# Altium PCB monitoring_board.PcbDoc
Units mm, origin at the board's own origin, x right, y up, seen from the top; angles counter-clockwise.
Board outline 82.91 x 56.91 mm, 2 copper layers (Top Layer, Bottom Layer); 71 components, 70 nets, 236 pads, 33 vias.
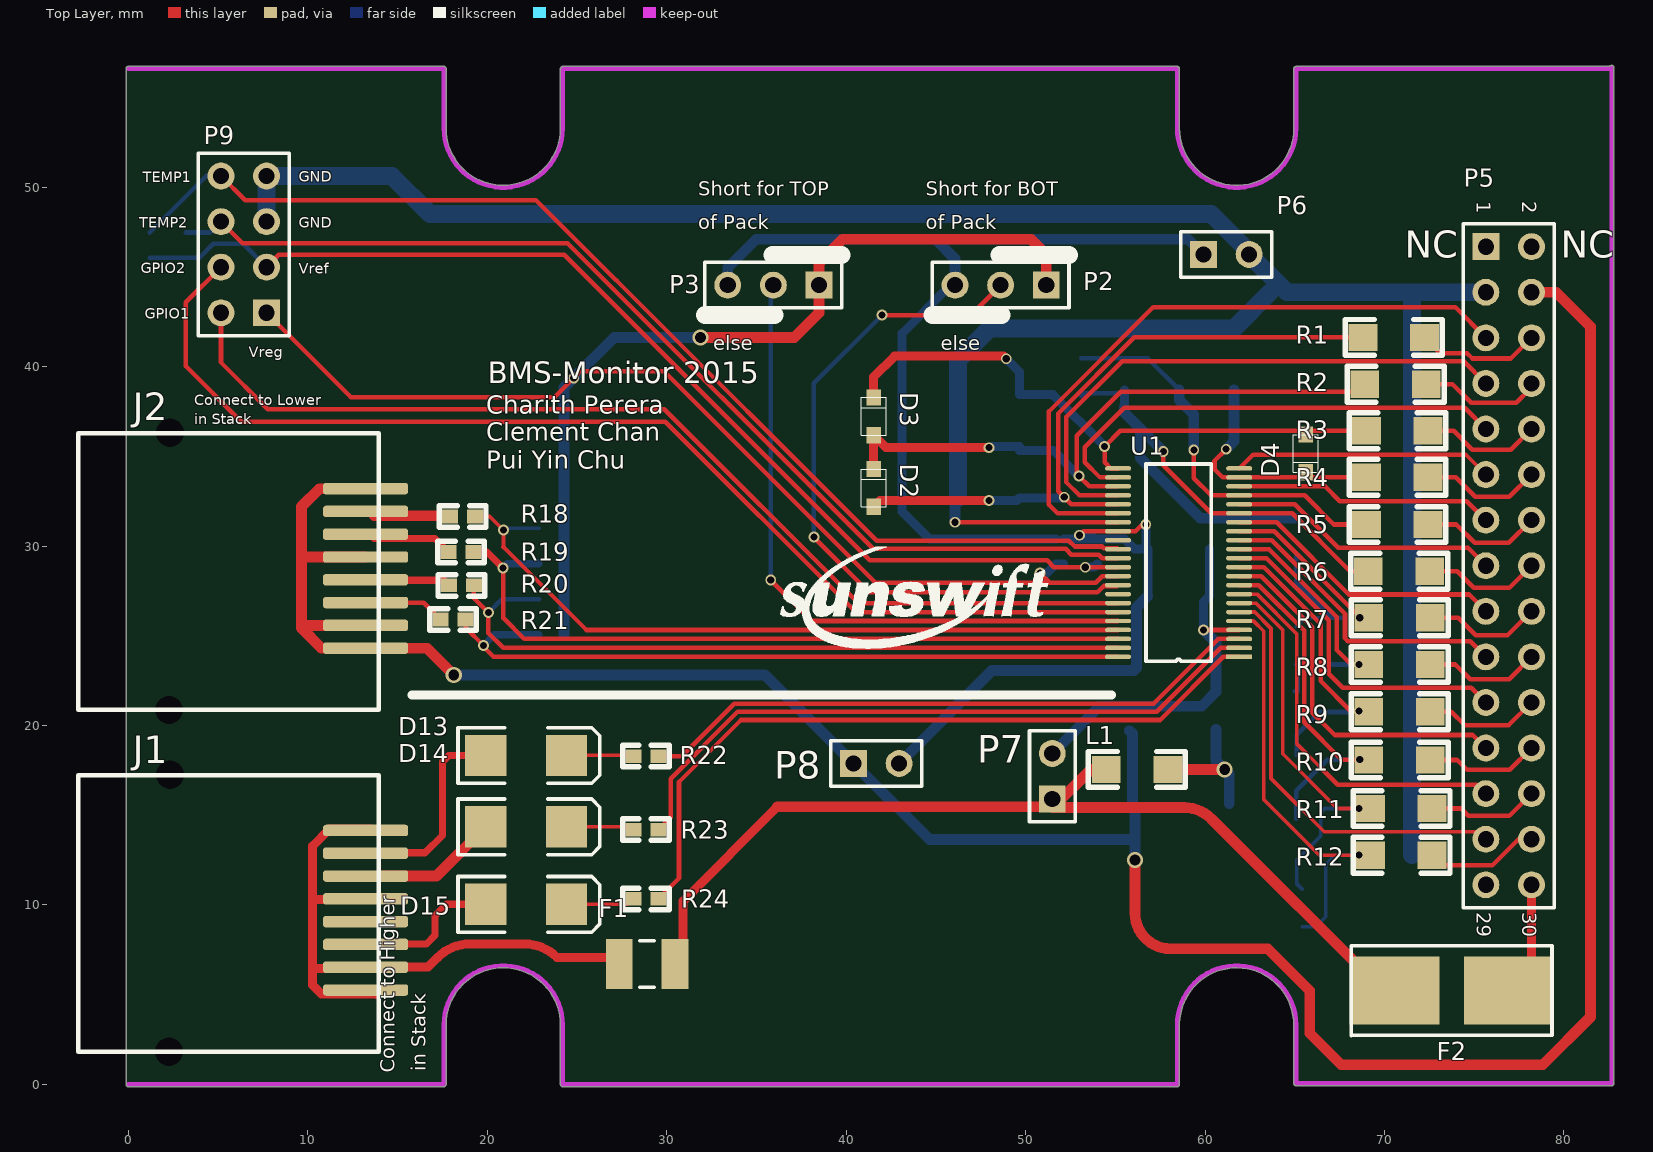
[diagram p0: Top Layer view]
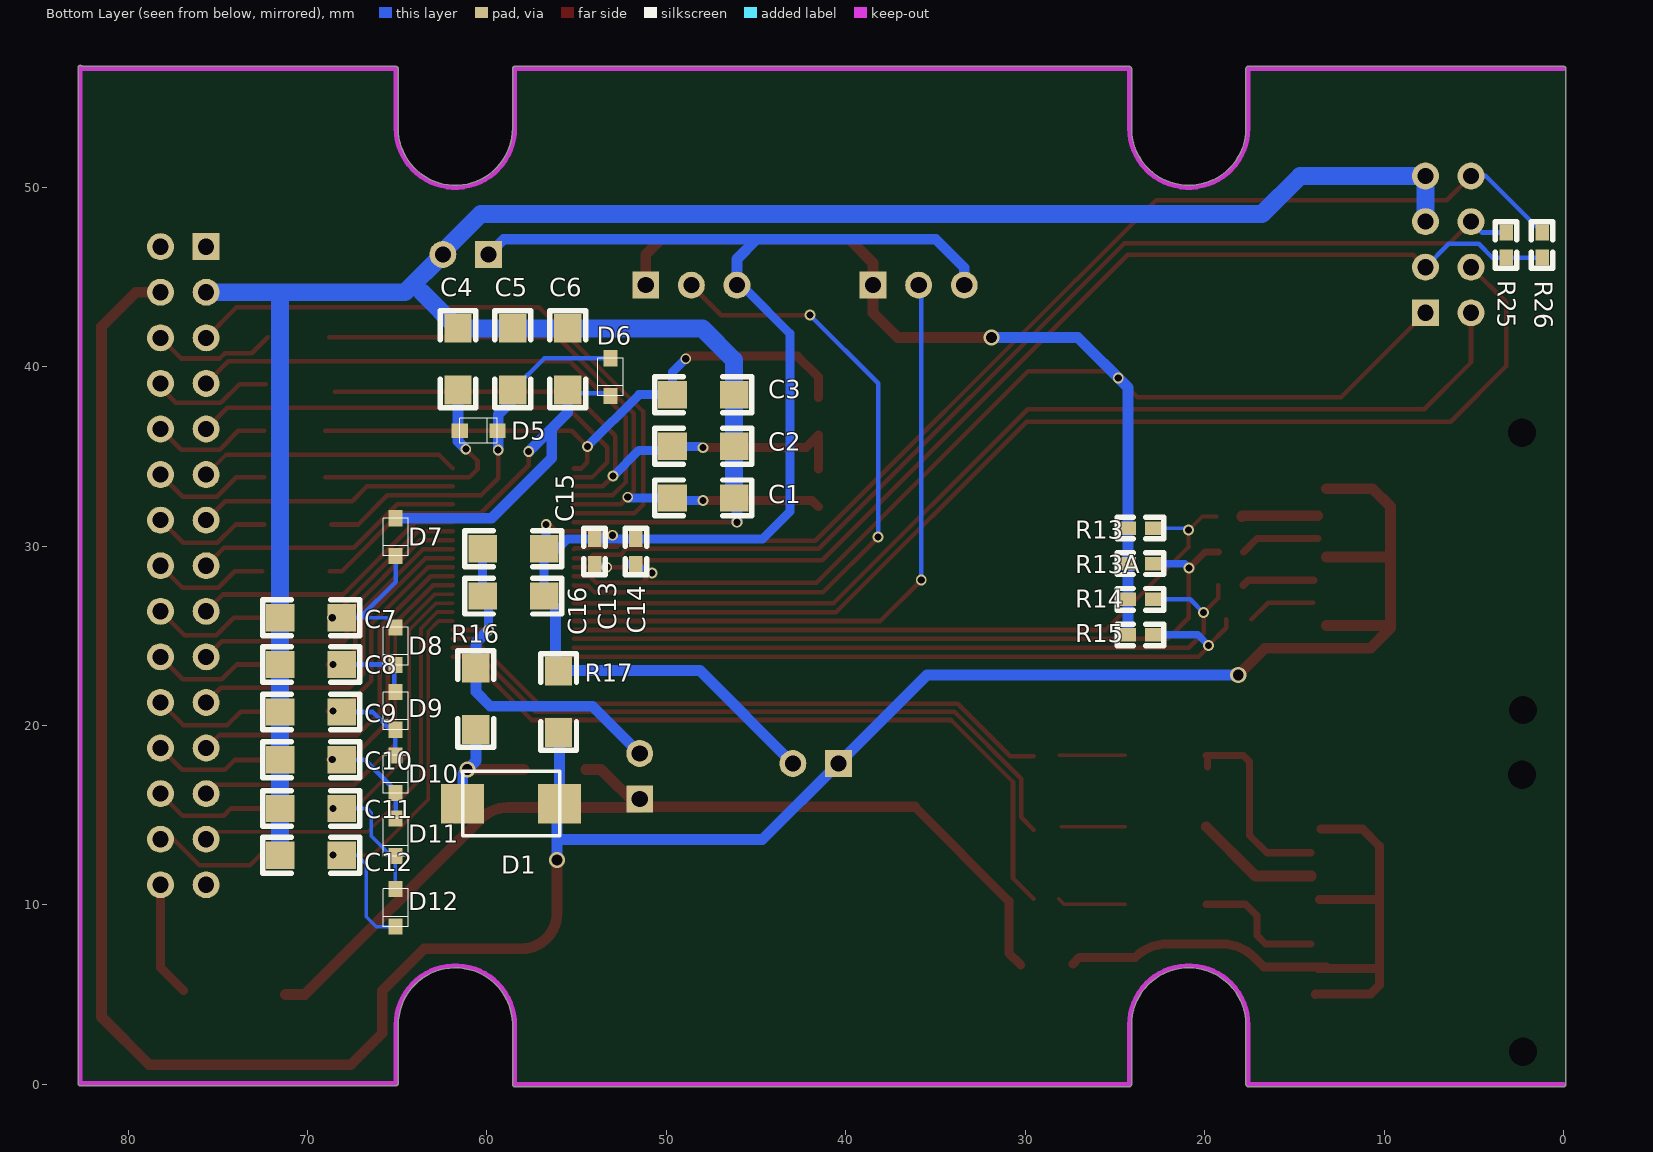
[diagram p1: Bottom Layer view, seen from below]

## Layer stack, top to bottom
Top Solder: solder mask 0.0102, Solder Resist, Dk 3.5
Top Layer: signal copper 0.0356
Dielectric1: dielectric 0.32, FR-4, Dk 4.8
Bottom Layer: signal copper 0.0356
Bottom Solder: solder mask 0.0102, Solder Resist, Dk 3.5

## Board outline
-0.127,0 ccw(c0,0) 0,-0.127 17.575,-0.127 ccw(c17.575,0) 17.702,0 17.702,3.31 ccw(c17.575,3.31) 17.702,3.312 cw(c20.89,3.31) 24.078,3.312 ccw(c24.205,3.31) 24.078,3.31 24.078,0 ccw(c24.205,0) 24.205,-0.127 58.445,-0.127 ccw(c58.445,0) 58.572,0 ccw(c58.445,0) 58.571,0.017 ccw(c58.448,0.05) 58.576,0.05 58.576,3.36 ccw(c58.448,3.36) 58.573,3.384 cw(c61.76,3.31) 64.948,3.31 ccw(c65.075,3.31) 64.951,3.282 64.951,0.05 ccw(c65.078,0.05) 65.078,-0.077 82.653,-0.077 ccw(c82.653,0.05) 82.781,0.05 82.781,56.655 ccw(c82.653,56.655) 82.548,56.727 65.075,56.727 ccw(c65.075,56.6) 64.948,56.6 64.948,53.29 cw(c65.075,53.29) 64.948,53.291 64.948,53.29 cw(c61.76,53.29) 58.572,53.29 ccw(c58.445,53.29) 58.572,53.291 58.572,56.6 ccw(c58.445,56.6) 58.445,56.727 24.205,56.727 ccw(c24.205,56.6) 24.078,56.6 24.078,53.29 ccw(c24.205,53.29) 24.078,53.288 ccw(c20.89,53.29) 24.078,53.29 24.078,53.288 cw(c20.89,53.29) 17.702,53.29 ccw(c17.575,53.29) 17.702,53.292 ccw(c17.575,53.295) 17.702,53.295 17.702,56.605 ccw(c17.575,56.605) 17.54,56.727 0,56.727 ccw(c0,56.6) -0.127,56.6

## Design rules (kind name [scope] priority, off if disabled: settings)
Clearance [All] p1: gap=0.2
Clearance Clearance_1 [InNet('C_0')] p2: gap=1
FabricationTestpoint [(IsPad And (OnTopLayer Or OnBottomLayer))] p1: side=3 testpointundercomponent=TRUE minsize=1.016 maxsize=2.54 preferedsize=1.524 minholesize=0 maxholesize=1.016 preferedholesize=0.813 testpointgrid=0.025 allowsidetop=TRUE allowsidebottom=TRUE usegrid=TRUE gridtolerance=0
HoleSize [All] p1: absolutevalues=TRUE maxlimit=4 minlimit=0.4 maxpercent=80.000 minpercent=20.000
MinimumSolderMaskSliver [All] p1 off: minsoldermaskwidth=0.254
PolygonConnect [All] p1: connectstyle=Relief reliefconductorwidth=0.254 reliefentries=4 polygonreliefangle="90 Angle" airgapwidth=0.254
RoutingVias [All] p1: holewidth=0.4 width=0.8 viastyle="Through Hole" minholewidth=0.2 minwidth=0.4 maxholewidth=0.6 maxwidth=1
SMDNeckDown [All] p1 off: percent=50.000
SilkToSilkClearance [All] p1 off: silktosilkclearance=0.05
SilkToSolderMaskClearance SilkscreenOverComponentPads [IsPad] p1 off: minsilkscreentomaskgap=0.05 clearancetoexposedcopper=TRUE
SolderMaskExpansion [All] p1: expansion=0.102
Width [All] p1: maxlimit=1 minlimit=0.2 preferedwidth=0.254
25 further rules are at their usual default settings.

## Components (designator, comment, footprint, x,y, rotation, side; value= is the part's Value field where it differs from the comment)
C1 "3.3uF 100V" 1206 49.654,32.68 r180 bottom
C2 "3.3uF 100V" 1206 49.654,35.559 r180 bottom
C3 "3.3uF 100V" 1206 49.654,38.437 r180 bottom
C4 "3.3uF 100V" 1206 61.614,38.7 r90 bottom
C5 "3.3uF 100V" 1206 58.558,38.7 r90 bottom
C6 "3.3uF 100V" 1206 55.502,38.7 r90 bottom
C7 "3.3uF 100V" 1206 68.092,26 r0 bottom
C8 "3.3uF 100V" 1206 68.092,23.4 r0 bottom
C9 "3.3uF 100V" 1206 68.092,20.75 r0 bottom
C10 "3.3uF 100V" 1206 68.092,18.1 r0 bottom
C11 "3.3uF 100V" 1206 68.092,15.375 r0 bottom
C12 "3.3uF 100V" 1206 68.092,12.775 r0 bottom
C13 "1uF 10V" 0603 54,29 r90 bottom
C14 "1uF 10V" 0603 51.7,29 r90 bottom
C15 "100nF 100V" 1206 60.241,29.843 r180 bottom
C16 "3.3uF 100V" 1206 60.241,27.212 r180 bottom
D1 "62V Zener" DO-214AA 55.95,15.65 r0 bottom
D2 "PDZ7.5B" SOD323 41.529,34.29 r270 top
D3 "PDZ7.5B" SOD323 41.529,38.278 r270 top
D4 "PDZ7.5B" SOD323 65.608,34.112 r90 top
D5 "PDZ7.5B" SOD323 59.419,36.425 r0 bottom
D6 "PDZ7.5B" SOD323 53.111,38.362 r90 bottom
D7 "PDZ7.5B" SOD323 65.092,29.447 r90 bottom
D8 "PDZ7.5B" SOD323 65.092,23.368 r90 bottom
D9 "PDZ7.5B" SOD323 65.092,19.761 r90 bottom
D10 "PDZ7.5B" SOD323 65.092,16.231 r90 bottom
D11 "PDZ7.5B" SOD323 65.092,12.725 r90 bottom
D12 "PDZ7.5B" SOD323 65.092,8.788 r90 bottom
D13 "D Schottky" SMB 22.169,18.331 r0 top
D14 "D Schottky" SMB 22.169,14.351 r0 top
D15 "D Schottky" SMB 22.169,10.033 r0 top
F1 "SATA_FUSE" RESC3225M_1210I 28.905,6.706 r180 top
F2 "SATA_FUSE" LITTELFUSE-154 73.736,5.232 r0 top
J1 "8P8C-1PORT" 8P8C-1PORT 2.261,17.069 r270 top
J2 "8P8C-1PORT" 8P8C-1PORT 2.261,36.119 r270 top
L1 "BLM31PG330SN1L" 1206 54.5,17.55 r0 top
P2 "Header 3" HDR1X3 51.15,44.54 r180 top
P3 "Header 3" HDR1X3 38.48,44.54 r180 top
P5 "Header 15X2" HDR2X15 75.65,46.682 r270 top
P6 "Header 2" HDR1X2 59.915,46.25 r0 top
P7 "Header 2" HDR1X2 51.486,15.9 r90 top
P8 "Header 2" HDR1X2 40.411,17.882 r0 top
P9 "Header 4X2" HDR2X4 7.7,43 r90 top
R1 "4.7k" 1206 72.225,41.625 r180 top
R2 "4.7k" 1206 72.325,39.025 r180 top
R3 "4.7k" 1206 72.425,36.425 r180 top
R4 "4.7k" 1206 72.425,33.825 r180 top
R5 "4.7k" 1206 72.425,31.2 r180 top
R6 "4.7k" 1206 72.525,28.6 r180 top
R7 "4.7k" 1206 72.55,26 r180 top
R8 "4.7k" 1206 72.55,23.4 r180 top
R9 "4.7k" 1206 72.55,20.775 r180 top
R10 "4.7k" 1206 72.55,18.075 r180 top
R11 "4.7k" 1206 72.65,15.375 r180 top
R12 "4.7k" 1206 72.65,12.775 r180 top
R13 "1M" 0603 24.281,30.994 r180 bottom
R13A "1M" 0603 24.281,29.014 r180 bottom
R14 "1M" 0603 24.281,27.034 r180 bottom
R15 "1M" 0603 24.281,25.054 r180 bottom
R16 "100R" 1206 60.614,19.775 r90 bottom
R17 "100R" 1206 56.009,19.609 r90 bottom
R18 "100r" 0603 19.329,31.648 r180 top
R19 "100r" 0603 19.228,29.667 r180 top
R20 "100r" 0603 19.253,27.813 r180 top
R21 "100r" 0603 18.796,25.908 r180 top
R22 "100r" 0603 28.143,18.288 r0 top
R23 "100r" 0603 28.143,14.199 r0 top
R24 "100r" 0603 28.143,10.338 r0 top
R25 "200k" 0603 3.2,46.076 r90 bottom
R26 "200k" 0603 1.194,46.076 r90 bottom
U1 "LTC6803-3" SOP44 61.9,23.822 r180 top

## Footprints (in the part's own frame and the unit in brackets; to place one, negate y for a bottom-side part, rotate by r counter-clockwise, add the part's x,y. Pads: shape width x height; smd on the part's side, far side on the other; paste and mask are expansions set on the pad)
8P8C-1PORT [mm]
  rrect50% 0.64x4.75 smd: 1(2.92,10.96) 2(4.19,10.96) 3(5.46,10.96) 4(6.73,10.96) 5(8,10.96) 6(9.27,10.96) 7(10.54,10.96) 8(11.81,10.96)
  round 0 hole 1.57: ""(-0.19,0.06) ""(15.25,0)
  silkscreen extent -0.17,-5.06 15.25,11.7
0603 [mil]
  rect 35.43x30 smd: 1(0,0) 2(55,0)
  silkscreen extent -24,-24 79,24
1206 [mil]
  rect 62.99x60 smd: 1(0,0) 2(135,0)
  silkscreen extent -39,-39 173,39
DO-214AA [mm]
  rect 2.4x2.2 smd: 1(0,0) 2(5.4,0)
  silkscreen extent 0,-1.8 5.4,1.8
HDR1X2 [mm] "Connector; Header; 2 Position"
  rect 1.5x1.5 hole 0.9: 1(0,0)
  round 1.5 hole 0.9: 2(2.54,0)
  silkscreen extent -1.27,-1.27 3.81,1.27
HDR1X3 [mm] "Connector; Header; 3 Position"
  rect 1.5x1.5 hole 0.9: 1(0,0)
  round 1.5 hole 0.9: 2(2.54,0) 3(5.08,0)
  silkscreen extent -1.27,-1.27 6.35,1.27
HDR2X4 [mm] "Connector; Header; 4x2 Position"
  rect 1.5x1.5 hole 0.9: 1(0,0)
  round 1.5 hole 0.9: 2(0,2.54) 3(2.54,0) 4(2.54,2.54) 5(5.08,0) 6(5.08,2.54) 7(7.62,0) 8(7.62,2.54)
  silkscreen extent -1.27,-1.27 8.89,3.81
HDR2X15 [mm] "Connector; Header; 15x2 Position"
  rect 1.5x1.5 hole 0.9: 1(0,0)
  round 1.5 hole 0.9: 2(0,2.54) 3(2.54,0) 4(2.54,2.54) 5(5.08,0) 6(5.08,2.54) 7(7.62,0) 8(7.62,2.54) 9(10.16,0) 10(10.16,2.54) 11(12.7,0) 12(12.7,2.54) 13(15.24,0) 14(15.24,2.54) 15(17.78,0) 16(17.78,2.54) 17(20.32,0) 18(20.32,2.54) 19(22.86,0) 20(22.86,2.54) 21(25.4,0) 22(25.4,2.54) 23(27.94,0) 24(27.94,2.54) 25(30.48,0) 26(30.48,2.54) 27(33.02,0) 28(33.02,2.54) 29(35.56,0) 30(35.56,2.54)
  silkscreen extent -1.27,-1.27 36.83,3.81
LITTELFUSE-154 [mm]
  rect 5x3.81 smd: 1(-3.185,0) 2(3.185,0)
  silkscreen extent -5.6,-2.51 5.6,2.5
RESC3225M_1210I [mm] "Chip Resistor, Body 3.2x2.5mm, IPC Low Density"
  rect 1.5x2.8 smd: 1(-1.55,0) 2(1.55,0)
  silkscreen extent -0.4,-1.3 0.4,1.3, body extent -1.68,-1.32 1.68,1.32, height 0.71
SMB [mm] "DO-214-AA/SMB; 2 C-Bend Leads; Body 5.3 x 3.6 mm, inc. leads (LxW)"
  rect 2.3x2.3 smd: 1(-2.25,0) 2(2.25,0)
  silkscreen extent -3.8,-1.55 4.1,1.55
SOD323 [mm]
  rect 0.9x0.8 smd: A(2.1,0) K(0,0)
  silkscreen extent 0,-0.7 2.1,0.7
SOP44 [mm]
  rect 1.45x0.25 smd: 1(0,0)
  oval 1.45x0.25 smd: 2(0,-0.5) 3(0,-1) 4(0,-1.5) 5(0,-2) 6(0,-2.5) 7(0,-3) 8(0,-3.5) 9(0,-4) 10(0,-4.5) 11(0,-5) 12(0,-5.5) 13(0,-6) 14(0,-6.5) 15(0,-7) 16(0,-7.5) 17(0,-8) 18(0,-8.5) 19(0,-9) 20(0,-9.5) 21(0,-10) 22(0,-10.5) 23(6.75,-10.5) 24(6.75,-10) 25(6.75,-9.5) 26(6.75,-9) 27(6.75,-8.5) 28(6.75,-8) 29(6.75,-7.5) 30(6.75,-7) 31(6.75,-6.5) 32(6.75,-6) 33(6.75,-5.5) 34(6.75,-5) 35(6.75,-4.5) 36(6.75,-4) 37(6.75,-3.5) 38(6.75,-3) 39(6.75,-2.5) 40(6.75,-2) 41(6.75,-1.5) 42(6.75,-1) 43(6.75,-0.5) 44(6.75,0)
  silkscreen extent 1.56,-10.75 5.19,0.25

## Part data
C1 C2 C3 C4 C5 C6 C7 C8 C9 C10 C11 C12 C13 C14 C15 C16: library part CAP, "Capacitor"
D1: library part "D Schottky", "SMBJ64CABCT-ND"
D2 D3 D4 D5 D6 D7 D8 D9 D10 D11 D12: library part ZENER1, "Zener Diode"
D13 D14 D15: "Schottky Diode"
F1 F2: library part FUSE, "Fuse"
L1: library part INDUCTOR
P2 P3: "Header, 3-Pin"
P5: "Header, 15-Pin, Dual row"
P6 P7 P8: "Header, 2-Pin"
P9: "Header, 4-Pin, Dual row"
R1 R2 R3 R4 R5 R6 R7 R8 R9 R10 R11 R12 R13 R13A R14 R15 R16 R17 R18 R19 R20 R21 R22 R23 R24 R25 R26: library part RES1, "Resistor"

## Via types
v1: diameter 0.6, hole 0.4, Top Layer to Bottom Layer, 29 vias
v2: diameter 0.9, hole 0.6, Top Layer to Bottom Layer, 4 vias

## Nets (pads, with @x,y where several pads share a name; then routed paths per layer and width w, separated by ;. In a path a pad name is that pad's centre, name@x,y a point inside that pad or via, vN(x,y) a via of type N, cw(c..) or ccw(c..) an arc to the next point about the centre after c; other vN are vias at no path point)
C_0: C1.2 C2.2 C3.2 C4.2 C5.2 C6.2 C7.2 C8.2 C9.2 C10.2 C11.2 C12.2 P5.3 P6.2 P9.5 P9.7 U1.29 | length 141.7
  Top Layer w0.254: v1(46.072,31.322) U1.29
  Bottom Layer w0.6: v1(46.072,31.322) 46.072,32.527 C1.2
  Bottom Layer w1: P9.5 P9.7 14.68,50.62 16.8,48.5 60.343,48.5 P6.2@62.524,46.319 ; C1.2 46.225,40.358 47.996,42.129 C6.2 C5.2 C4.2 63.628,44.142 ; P6.2 64.563,44.142 71.552,44.142 ; C12.2 C11.2 C10.2 C9.2 C8.2 C7.2 71.521,44.111 71.552,44.142 ; P5.3 71.552,44.142
C_1: P5.6 R1.1 | length 6.9
  Top Layer w0.254: R1.1 73.098,40.752 74.6,40.752 74.902,40.45 77.038,40.45 P5.6
C_1F: C1.1 D2.A R1.2 U1.27 | length 37.5
  Top Layer w0.254: U1.27 52.553,32.322 v1(52.15,32.725) 51.826,33.049 51.826,37.386 56.064,41.625 R1.2
  Top Layer w0.5: D2.A 41.876,32.537 v1(47.955,32.537)
  Bottom Layer w0.5: v1(47.955,32.537) 49.511,32.537 C1.1 v1@52.15,32.68
C_2: P5.8 R2.1 | length 6.9
  Top Layer w0.254: R2.1 73.787,39.025 74.826,37.985 77.34,37.985 78.19,38.836 P5.8
C_2F: C2.1 D2.K D3.A R2.2 U1.25 | length 35.4
  Top Layer w0.254: U1.25 53.549,33.322 v1(52.971,33.9) 52.848,34.023 52.848,36.148 55.3,38.6 R2.2@68.471,38.6
  Top Layer w0.5: D2.K D3.A 42.223,35.484 v1(47.955,35.484)
  Bottom Layer w0.5: v1@48.157,35.559 C2.1 ; C2.1@49.654,35.337 51.534,35.337 v1(52.971,33.9)
C_3: P5.10 R3.1 | length 6.7
  Top Layer w0.254: R3.1 73.85,36.425 74.9,35.375 77.043,35.375 P5.10
C_3F: C3.1 D3.K D4.A R3.2 U1.23 | length 34.1
  Top Layer w0.254: U1.23 54.753,34.322 54.4,34.675 v1(54.4,35.55) 55.275,36.425 R3.2
  Top Layer w0.5: D3.K 41.529,39.421 42.697,40.589 48.768,40.589 v1(48.92,40.437)
  Bottom Layer w0.5: v1(48.92,40.437) 49.654,39.703 C3.1 51.513,38.437 v1(54.4,35.55)
C_4: P5.12 R4.1 | length 6.7
  Top Layer w0.254: R4.1 73.975,33.825 75.05,32.75 76.958,32.75 P5.12
C_4F: C4.1 D4.K D5.A R4.2 U1.21 | length 13.5
  Top Layer w0.254: v1(61.175,35.4) 60.525,34.75 60.525,34.275 60.978,33.822 U1.21 R4.2@68.996,33.822
  Bottom Layer w0.6: v1(61.175,35.4) 61.614,35.839 C4.1
C_5: P5.14 R5.1 | length 6.7
  Top Layer w0.254: R5.1 73.994,31.2 75.019,30.175 76.923,30.175 P5.14
C_5F: C5.1 D5.K D6.A R5.2 U1.19 | length 21.8
  Top Layer w0.254: v1(59.375,35.35) 59.375,33.775 60.328,32.822 U1.19 65.553,32.822 67.175,31.2 R5.2@68.671,31.2
  Bottom Layer w0.254: D6.A 56.796,40.462 C5.1
  Bottom Layer w0.6: C5.1 58.558,38.142 59.375,37.325 v1(59.375,35.35)
C_6: P5.16 R6.1 | length 6.6
  Top Layer w0.254: R6.1 74.054,28.6 74.979,27.675 76.963,27.675 P5.16
C_6F: C6.1 D6.K D7.A R6.2 U1.17 | length 32.9
  Top Layer w0.254: v1(57.675,35.275) 57.675,34.495 60.348,31.822 U1.17 64.856,31.822 68.078,28.6 R6.2@68.771,28.6
  Bottom Layer w0.254: D6.K 53.256,38.506 55.308,38.506 C6.1
  Bottom Layer w0.5: 55.502,37.743 C6.1
  Bottom Layer w0.6: 55.502,37.743 55.502,37.448 v1(57.675,35.275) ; 56.388,36.562 56.388,34.9 59.741,31.547 D7.A
C_7: P5.18 R7.1 | length 6.6
  Top Layer w0.254: R7.1 74.114,26 75.089,25.025 76.853,25.025 P5.18
C_7F: C7.1 D7.K D8.A R7.2 U1.15 | length 16.2
  Top Layer w0.254: U1.15 63.85,30.822 68.625,26.047 v1(68.625,26)
  Bottom Layer w0.2: D8.A@65.092,25.517 65.575,26 C7.1@67.599,26
  Bottom Layer w0.254: D7.K 65.092,27.999 67.091,26 C7.1@67.599,26
C_8: P5.20 R8.1 | length 6.5
  Top Layer w0.254: R8.1 73.95,23.4 74.775,22.575 76.943,22.575 P5.20
C_8F: C8.1 D8.K D9.A R8.2 U1.13 | length 15.2
  Top Layer w0.254: U1.13 63.566,29.822 67.343,26.045 67.343,24.207 68.15,23.4 v1(68.58,23.4) R8.2@68.871,23.4
  Bottom Layer w0.254: D9.A@64.999,21.912 65.176,21.912 D8.K@65.176,23.19 ; D8.K@65.092,23.4 C8.1
C_9: P5.22 R9.1 | length 6.5
  Top Layer w0.254: R9.1 73.715,20.775 74.465,20.025 76.933,20.025 P5.22
C_9F: C9.1 D9.K D10.A R9.2 U1.11 | length 16.8
  Top Layer w0.254: U1.11 63.282,28.822 66.435,25.669 66.435,22.49 68.125,20.8 v1(68.58,20.8) R9.2@68.871,20.8
  Bottom Layer w0.254: D10.A@65.1,18.331 65.1,19.481 66.369,20.75 C9.1
C_10: P5.24 R10.1 | length 6.4
  Top Layer w0.254: R10.1 74.05,18.075 74.6,17.525 76.973,17.525 P5.24
C_10F: C10.1 D10.K D11.A R10.2 U1.9 | length 19.3
  Top Layer w0.254: U1.9 62.997,27.822 65.527,25.293 65.527,20.173 67.6,18.1 R10.2@68.871,18.1
  Bottom Layer w0.254: D11.A@65.075,14.808 65.075,16.361 66.814,18.1 C10.1
  other v1: 68.625,18.1
C_11: P5.26 R11.1 | length 6.2
  Top Layer w0.254: R11.1 74.275,15.375 74.675,14.975 76.963,14.975 P5.26
C_11F: C11.1 D11.K D12.A R11.2 U1.7 | length 22.1
  Top Layer w0.2: U1.7 62.828,26.822 64.325,25.325 64.325,18.425 67.375,15.375 v1(68.58,15.375)
  Bottom Layer w0.2: D12.A@65.405,10.888 65.1,11.193 65.1,12.497 66.446,13.843 66.446,15.138 66.683,15.375 C11.1
C_12: P5.28 R12.1 | length 6.4
  Top Layer w0.254: R12.1 73.226,12.199 76.004,12.199 77.467,13.662 P5.28
C_12F: C12.1 D12.K R12.2 U1.5 | length 23.6
  Top Layer w0.2: U1.5 62.697,25.822 63.275,25.244 63.275,15.875 66.375,12.775 v1(68.58,12.775)
  Bottom Layer w0.2: D12.K@65.405,8.788 66.167,8.788 66.726,9.347 66.726,12.268 67.233,12.775 C12.1
CSBI: R15.2 R21.1 U1.44 | length 40.9
  Top Layer w0.254: R21.1 18.796,25.451 v1(19.787,24.46) 19.787,24.381 20.345,23.822 53.712,23.822 53.729,23.84 55.132,23.84 U1.44
  Bottom Layer w0.4: v1(19.787,24.46) 20.38,25.054 R15.2
CSBO: R24.2 U1.1 | length 41.1
  Top Layer w0.254: R24.2 30.683,11.481 30.683,16.851 34.136,20.304 57.504,20.304 61.022,23.822 U1.1
GPIO1: P9.2 U1.38 | length 58.3
  Top Layer w0.254: P9.2 5.16,40.23 7.772,37.617 29.872,37.617 40.667,26.822 U1.38
GPIO2: P9.4 U1.39 | length 63.9
  Top Layer w0.254: P9.4 3.2,43.58 3.2,40.031 6.299,36.932 29.915,36.932 40.525,26.322 U1.39
NetD1_2: D1.2 L1.2 R16.1 | length 7.6
  Top Layer w0.6: L1.2 v2(61.091,17.55)
  Bottom Layer w0.6: R16.1 60.614,18.027 v2(61.091,17.55) 61.35,17.291 D1.2
NetD13_1: D13.1 J1.2 | length 10.9
  Top Layer w0.4: J1.2@14.095,12.903 16.535,12.903 17.501,13.868 17.501,17.983 17.848,18.331 D13.1 ; D13.1@19.837,17.704 D13.1@19.837,18.08
NetD13_2: D13.2 R22.1 | length 3.7
  Top Layer w0.2: D13.2 R22.1@28.1,18.331
NetD14_1: D14.1 J1.3 | length 7
  Top Layer w0.6: J1.3@14.07,11.608 17.176,11.608 D14.1
NetD14_2: D14.2 R23.1 | length 3.6
  Top Layer w0.2: D14.2 R23.1@27.991,14.351
NetD15_1: D15.1 J1.6 | length 7.4
  Top Layer w0.4: J1.6@14.095,7.823 16.612,7.823 17.094,8.306 17.094,9.398 17.729,10.033 D15.1
NetD15_2: D15.2 R24.1 | length 3.9
  Top Layer w0.2: D15.2 27.838,10.033 R24.1
NetF1_2: F1.2 J1.1 J1.4 J1.7 J1.8 | length 36.7
  Top Layer w0.5: 10.262,6.452 J1.7@13.668,6.452 ; 10.262,10.16 10.262,5.537 10.77,5.029 13.82,5.029 J1.8@13.831,5.019 ; J1.7 16.689,6.529 17.241,7.081 cw(c19.037,5.285) 19.037,7.825 22.085,7.825 cw(c22.085,5.285) 23.881,7.081 26.98,7.081 F1.2 ; J1.1@13.515,14.224 11.201,14.224 10.262,13.284 10.262,10.312 J1.4@13.617,10.312
NetF2_2: F2.2 P5.30 | length 6.4
  Top Layer w0.5: F2.2 78.19,6.501 P5.30
NetJ2_2: J2.2 R18.2 | length 4.2
  Top Layer w0.6: J2.2@13.704,31.689 17.892,31.689 R18.2
NetJ2_3: J2.3 R19.2 | length 4.4
  Top Layer w0.4: J2.3@13.704,30.419 17.079,30.419 R19.2
NetJ2_5: J2.5 R20.2 | length 4.1
  Top Layer w0.4: J2.5@13.917,28.092 17.577,28.092 R20.2
NetJ2_6: J2.6 R21.2 | length 3.8
  Top Layer w0.254: J2.6@13.943,26.848 16.459,26.848 R21.2
S_1: P5.5 U1.28 | length 36.7
  Top Layer w0.25: U1.28 51.778,31.822 51.3,32.3 51.3,37.5 57.1,43.3 73.952,43.3 P5.5
S_2: P5.7 U1.26 | length 32
  Top Layer w0.25: U1.26 53,32.822 52.278,33.545 52.278,37.199 55.378,40.3 74.412,40.3 P5.7
S_3: P5.9 U1.24 | length 26.8
  Top Layer w0.25: U1.24 54.148,33.822 53.3,34.67 53.3,35.5 55.5,37.7 74.472,37.7 P5.9
S_4: P5.11 U1.22 | length 14.5
  Top Layer w0.2: 74.532,35.1 P5.11
  Top Layer w0.25: U1.22 62.678,35.1 74.532,35.1
S_5: P5.13 U1.20 | length 14.5
  Top Layer w0.254: U1.20 66.686,33.322 67.509,32.5 74.592,32.5 P5.13
S_6: P5.15 U1.18 | length 15.2
  Top Layer w0.254: U1.18 64.998,32.322 67.42,29.9 74.652,29.9 P5.15
S_7: P5.17 U1.16 | length 15.8
  Top Layer w0.254: U1.16 63.992,31.322 68.014,27.3 74.712,27.3 P5.17
S_8: P5.19 U1.14 | length 17.3
  Top Layer w0.254: U1.14 63.708,30.322 67.797,26.233 67.797,24.853 67.95,24.7 74.772,24.7 P5.19
S_9: P5.21 U1.12 | length 18.8
  Top Layer w0.254: U1.12 63.424,29.322 66.889,25.857 66.889,22.886 67.675,22.1 74.832,22.1 P5.21
S_10: P5.23 U1.10 | length 20.5
  Top Layer w0.254: U1.10 63.14,28.322 65.981,25.481 65.981,20.719 67.23,19.47 74.923,19.47 P5.23
S_11: P5.25 U1.8 | length 21.9
  Top Layer w0.2: U1.8 62.894,27.322 65.1,25.116 65.1,19 66.475,17.625
  Top Layer w0.254: 66.475,17.625 67.4,16.7 75.152,16.7 P5.25
S_12: P5.27 U1.6 | length 23.9
  Top Layer w0.2: U1.6 62.762,26.322 63.675,25.41 63.675,17.05 66.65,14.075 75.237,14.075 P5.27
  Top Layer w0.254: P5.27@75.212,14.1 P5.27@75.237,14.075
SCKI: R13.2 R18.1 U1.41 | length 41
  Top Layer w0.2: R18.1 20.142,31.648 v1(20.904,30.886) 20.904,29.947
  Top Layer w0.254: 20.904,29.947 25.528,25.322 U1.41
  Bottom Layer w0.2: v1(20.904,30.886) 21.012,30.994 R13.2
SCKO: R22.2 U1.3 | length 35.1
  Top Layer w0.254: R22.2 29.54,18.291 30.839,18.291 33.76,21.212 57.128,21.212 60.738,24.822 U1.3
SDI: R13A.2 R19.1 U1.42 | length 41.8
  Top Layer w0.254: v1(20.879,28.778) 20.879,25.984 20.89,25.996 22.064,24.822 U1.42
  Top Layer w0.4: R19.1 19.99,29.667 v1(20.879,28.778)
  Bottom Layer w0.4: v1(20.879,28.778) 21.115,29.014 R13A.2 R13A.2@22.828,29.07
SDO: R14.2 R20.1 U1.43 | length 41.6
  Top Layer w0.254: R20.1 19.253,27.102 v1(20.066,26.289) 20.066,25.146 20.89,24.322 U1.43
  Bottom Layer w0.254: v1(20.066,26.289) 20.811,27.034 R14.2
SDOI: R23.2 U1.2 | length 37.8
  Top Layer w0.254: R23.2 30.229,14.888 30.229,17.04 33.948,20.758 57.316,20.758 60.88,24.322 U1.2
TOS: P2.2 U1.36 | length 39.6
  Top Layer w0.254: v1(38.2,30.5) 41.286,27.414 54.002,27.414 54.363,27.774 55.102,27.774 U1.36 ; v1(41.995,42.87) 46.94,42.87 P2.2
  Bottom Layer w0.254: v1(38.2,30.5) 38.2,39.075 v1(41.995,42.87)
V+_FILTERED: C15.1 C16.1 P7.2 R16.2 U1.4 | length 20.9
  Top Layer w0.254: v1(59.915,25.322) U1.4
  Bottom Layer w0.5: v1(59.915,25.322) 59.915,26.886 C16.1 C15.1
  Bottom Layer w0.6: P7.2 54.12,21.075 59.81,21.075 60.614,21.879 R16.2 60.614,24.623 v1(59.915,25.322)
V+_UNFILTERED: F1.1 F2.1 L1.1 P7.1 | length 54.3
  Top Layer w0.5: F1.1@30.252,6.655 30.912,7.315 30.912,10.211 36.166,15.465
  Top Layer w0.6: 36.166,15.465 P7.1@51.457,15.465 ; P7.1@51.515,15.425 P7.1@51.518,15.425 ; L1.1 53.643,17.55 P7.1@51.518,15.425 ; F2.1@71.222,5.004 70.151,5.004 60.362,14.793 ccw(c58.837,13.269) 58.837,15.425 P7.1@51.518,15.425
V-_FILTERED: C13.2 C14.2 C15.2 C16.2 P2.3 P3.3 P6.1 P8.2 R17.2 U1.30 | length 88.3
  Top Layer w0.254: v1(53,30.6) 53.222,30.822 U1.30 56.122,30.822 v1@56.6,31.3
  Bottom Layer w0.254: v1(53,30.6) 53.797,30.6 C13.2
  Bottom Layer w0.5: P2.3@46.321,44.289 45.559,44.289 43.114,41.844 43.114,31.914 44.631,30.397 C14.2 ; 52.1,30.397 C13.2 55.505,30.397 56.059,29.843 C15.2 ; v1(56.7,31.2) 56.7,29.956 C15.2 ; C16.2 C15.2
  Bottom Layer w0.6: P3.3 33.4,45.51 34.99,47.1 44.97,47.1 ; P8.2 48.133,23.063 R17.2@56.034,23.063 ; P2.3 46.07,46 44.97,47.1 ; R17.2@56.175,23.204 56.175,26.575 C16.2 ; P6.1 59.065,47.1 44.97,47.1
V-_UNFILTERED: D1.1 J2.1 J2.4 J2.7 J2.8 P5.4 P8.1 R17.1 | length 153.8
  Top Layer w0.6: J2.7 9.805,25.579 9.652,25.425 ; J2.4 9.676,29.389 9.652,29.413 ; J2.1 10.644,33.199 9.652,32.207 9.652,29.413 ; v2(18.136,22.809) 16.636,24.309 J2.8 10.769,24.309 9.652,25.425 ; v2(56.1,12.5) 56.1,9.532 ccw(c58.072,9.532) 58.072,7.56 63.5,7.56 65.837,5.223 65.837,2.845 67.589,1.092 78.816,1.092 81.475,3.751 81.475,42.225 79.558,44.142 P5.4 ; 9.652,25.425 9.652,29.413
  Bottom Layer w0.6: v2(18.136,22.809) 35.484,22.809 P8.1 44.653,13.64 56.1,13.64 ; R17.1@55.79,19.71 55.95,19.55 D1.1 56.1,15.5 56.1,13.64 ; v2(56.1,12.5) 56.1,13.64
VMODE: P3.2 U1.40 | length 36.8
  Top Layer w0.254: v1(35.8,28.1) 38.078,25.822 U1.40
  Bottom Layer w0.254: v1(35.8,28.1) 35.8,44.4 P3.2
VREF: C13.1 P9.3 R25.1 R26.1 U1.34 | length 63.1
  Top Layer w0.254: P9.3 8.388,46.228 24.294,46.228 41.322,29.2 51.2,29.2 51.577,28.822 v1(53.322,28.822) U1.34
  Bottom Layer w0.254: R26.1 R25.1 3.962,46.076 4.724,46.838 6.402,46.838 P9.3
  Bottom Layer w0.5: v1(53.322,28.822) 53.822,28.822 C13.1
VREG: C14.1 P2.1 P3.1 P9.1 R13.1 R13A.1 R14.1 R15.1 U1.35 | length 105.1
  Top Layer w0.254: P9.1 12.397,38.303 23.753,38.303 25.201,39.751 29.836,39.751 41.633,27.954 51.346,27.954 ; v1(50.8,28.5) 51.346,27.954 ; U1.35 54.269,28.322 53.9,27.954 51.346,27.954
  Top Layer w0.6: v2(31.884,41.625) 37.11,41.625 38.48,42.995 P3.1 38.48,45.78 39.8,47.1 50.3,47.1 51.15,46.25 P2.1
  Bottom Layer w0.5: v1(50.8,28.5) 51.2,28.5 C14.1 52.1,29
  Bottom Layer w0.6: R15.1 R14.1 R13A.1 R13.1 24.281,38.831 27.075,41.625 v2(31.884,41.625)
  other v1: 24.816,39.366
VTEMP1: P9.8 R26.2 U1.32 | length 63.9
  Top Layer w0.254: P9.8 6.504,49.276 22.713,49.276 27.189,44.8 27.2,44.8 41.7,30.3 52.413,30.3 52.74,29.973 54.26,29.973 54.363,29.87 55.102,29.87 U1.32
  Bottom Layer w0.254: R26.2 4.341,50.62 P9.8
VTEMP2: P9.6 R25.2 U1.33 | length 60
  Top Layer w0.254: P9.6 6.377,46.863 24.484,46.863 41.503,29.843 52.228,29.843 52.552,29.519 54.072,29.519 54.269,29.322 U1.33
  Bottom Layer w0.254: R25.2 4.553,47.473 P9.6
WDTB: U1.37
pads on no net: J1. J1.5 J2. P5.1 P5.2 P5.29 U1.31

## Keep-outs
Keep-Out Layer:
  lines w0.254: 0,0 17.575,0 17.575,3.31 cw(c20.89,3.31) 24.205,3.31 ; 0,56.6 17.575,56.6 ; 17.575,53.29 ccw(c20.89,53.29) 24.205,53.29 ; 17.575,53.295 17.575,56.605 ; 24.205,3.31 24.205,0 58.445,0 ; 24.205,53.29 24.205,56.6 58.445,56.6 58.445,53.29 ccw(c61.76,53.29) 65.075,53.29 65.075,56.6 82.65,56.6 ; 58.445,3.31 cw(c61.76,3.31) 65.075,3.31 ; 58.448,0.05 58.448,3.36 ; 65.078,3.36 65.078,0.05 82.653,0.05 82.653,56.655

## Other copper
Bottom Layer:
  pour cut-out: 17.13,-0.7 17.13,3.52 cw(c20.61,3.52) 20.61,7 21.15,7 cw(c21.15,3.52) 24.63,3.52 24.63,-0.7
  pour cut-out: 58.003,-0.65 58.003,3.57 cw(c61.483,3.57) 61.483,7.05 62.023,7.05 cw(c62.023,3.57) 65.503,3.57 65.503,-0.65
  pour cut-out: 65.52,57.3 65.52,53.08 cw(c62.04,53.08) 62.04,49.6 61.5,49.6 cw(c61.5,53.08) 58.02,53.08 58.02,57.3
  pour cut-out: 24.65,57.3 24.65,53.08 cw(c21.17,53.08) 21.17,49.6 20.63,49.6 cw(c20.63,53.08) 17.15,53.08 17.15,57.3

## Silkscreen, mask and mechanical layers (free items; w line width, h text height)
Top Overlay:
  drawing of 1664 lines, arcs and shapes, not listed
  text "GND" at 9.5,50.29 h0.6
  text "TEMP1" at 0.8,50.267 h0.6
  text "Short for TOP" at 31.77,49.512 h0.8
  text "Short for BOT" at 44.44,49.512 h0.8
  text "TEMP2" at 0.6,47.734 h0.6
  text "GND" at 9.5,47.738 h0.6
  text "of Pack" at 31.77,47.665 h0.8
  text "of Pack" at 44.44,47.665 h0.8
  text "NC" at 71.12,46.053 h1.5
  text "NC" at 79.815,46.053 h1.5
  text "GPIO2" at 0.7,45.202 h0.6
  text "Vref" at 9.5,45.187 h0.6
  text "GPIO1" at 0.9,42.67 h0.6
  text "else" at 32.6,40.9 h0.8
  text "else" at 45.27,40.9 h0.8
  text "Vreg" at 6.706,40.528 h0.6
  text "BMS-Monitor 2015" at 20.039,39.065 h1.2
  text "Connect to Lower" at 3.658,37.846 h0.6
  text "Charith Perera" at 19.939,37.363 h1
  text "in Stack" at 3.658,36.779 h0.6
  text "Clement Chan" at 19.939,35.865 h1
  text "Pui Yin Chu" at 19.939,34.315 h1
  text "in Stack" at 16.561,0.737 h0.8 r90
  text "Connect to Higher" at 14.834,0.66 h0.8 r90
Mechanical 1:
  lines w0.254: 17.575,53.29 ccw(c20.89,53.29) 24.205,53.29 ; 17.575,53.295 17.575,56.605 ; 17.575,56.6 0,56.6 0,0 17.575,0 17.575,3.31 cw(c20.89,3.31) 24.205,3.31 ; 24.205,3.31 24.205,0 58.445,0 ; 24.205,53.29 24.205,56.6 58.445,56.6 58.445,53.29 ccw(c61.76,53.29) 65.075,53.29 65.075,56.6 82.65,56.6 ; 58.445,3.31 cw(c61.76,3.31) 65.075,3.31 ; 58.448,0.05 58.448,3.36 ; 65.078,3.36 65.078,0.05 82.653,0.05 82.653,56.655

## Text inside footprints (layer, text, board x,y; h text height)
P5: Top Overlay "1" at 75.142,49.222 h0.8 r270; Top Overlay "2" at 77.682,49.222 h0.8 r270; Top Overlay "29" at 75.142,9.598 h0.8 r270; Top Overlay "30" at 77.682,9.598 h0.8 r270